# Altium PCB CE_BJTInfineonTSFP-4-1_Simple_v1.PcbDoc
Units mm, origin at the board's own origin, x right, y up, seen from the top; angles counter-clockwise.
Board outline 40 x 8 mm, 2 copper layers (Top Layer, Bottom Layer); 17 components, 8 nets, 41 pads, 4 vias.
Unrouted connection lines stored in the file: 1.
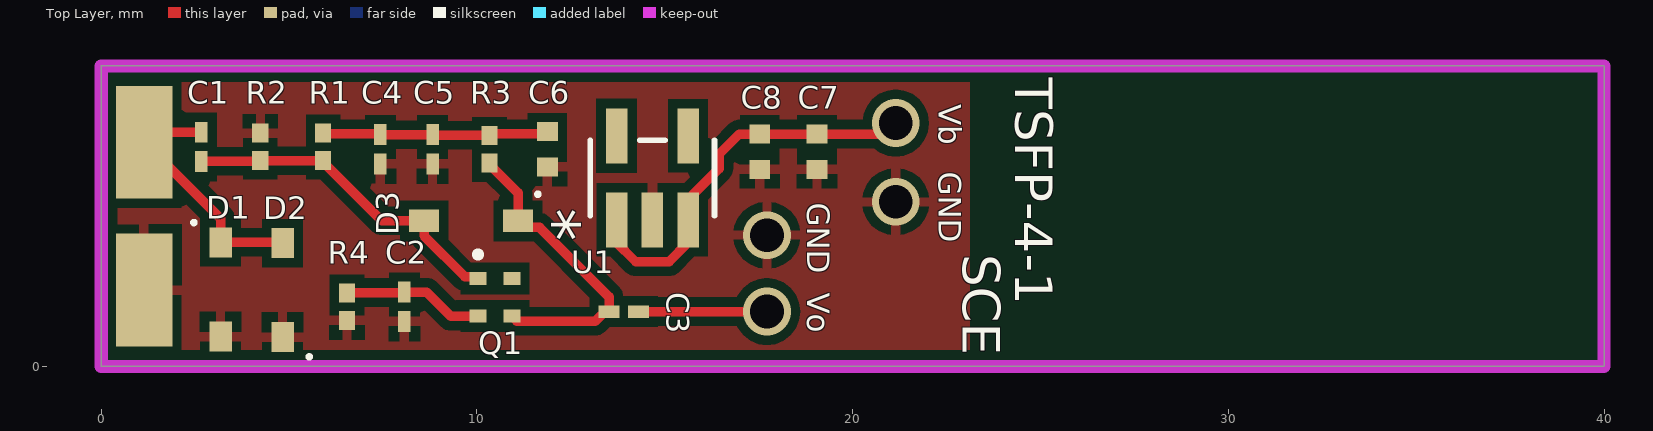
[diagram p0: Top Layer view]
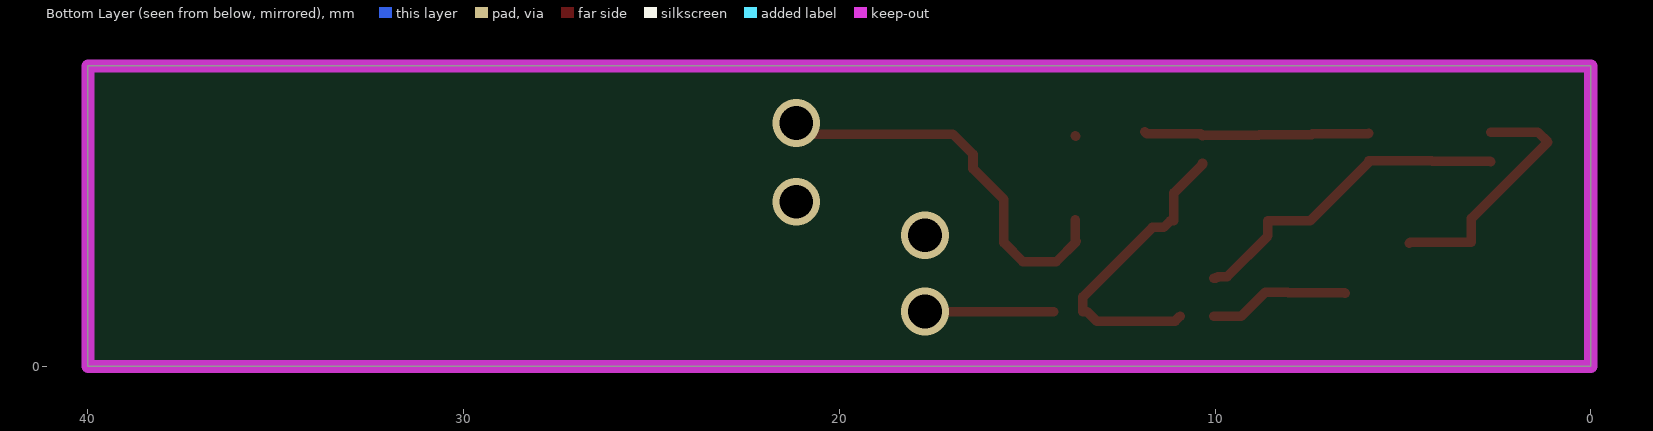
[diagram p1: Bottom Layer view, seen from below]

## Layer stack, top to bottom
Top Solder: solder mask 0.0102, Solder Resist, Dk 3.5
Top Layer: signal copper 0.0356
Dielectric 1: dielectric 0.32, FR-4, Dk 4.8
Bottom Layer: signal copper 0.0356
Bottom Solder: solder mask 0.0102, Solder Resist, Dk 3.5

## Board outline
0,0 0,8 40,8 40,0

## Design rules (kind name [scope] priority, off if disabled: settings)
Clearance [All] p1: gap=0.254 ignorepadtopadclearanceinfootprint=FALSE except(0: Arc-Hole Track-Hole SMDPad-Hole THPad-Hole Via-Hole Fill-Hole Poly-Hole Region-Hole Text-Hole)
PolygonConnect [All] p1: connectstyle=Relief reliefconductorwidth=0.254 reliefentries=4 polygonreliefangle="90 Angle" airgapwidth=0.254
RoomDefinition CE_BJTInfineonTSFP-4-1_Simple_v1 [InComponentClass('CE_BJTInfineonTSFP-4-1_Simple_v1')] p1: confinementstyle=ConfineIn formatcopy=TRUE lockcomponents=FALSE outline 0,0 40.005,0 40.005,7.937 0,7.937
RoutingVias [All] p1: holewidth=0.711 width=1.27 viastyle="Through Hole" minholewidth=0.711 minwidth=1.27 maxholewidth=0.711 maxwidth=1.27
SolderMaskExpansion [All] p1: expansion=0.102
Width [All] p1: maxlimit=0.254 minlimit=0.254 preferedwidth=0.254
30 further rules are at their usual default settings.

## Components (designator, comment, footprint, x,y, rotation, side; value= is the part's Value field where it differs from the comment)
C1 "Cin" C0201 2.667,5.841 r270 top value=Value
C2 "" C0201 8.064,1.587 r90 top value=Value
C3 "" C0201 13.906,1.46 r0 top value=Value
C4 "" CAP_CBR_0201 7.429,5.778 r90 top value=Value
C5 "" CAP_CBR_0201 8.818,5.778 r90 top value=Value
C6 "" YAG_CC0402 11.874,5.778 r90 top value=Value
C7 "" YAG_CC0402 19.05,5.714 r90 top value=Value
C8 "" YAG_CC0402 17.526,5.714 r90 top value=Value
D1 "" INF-SOD323_V 3.175,2.051 r0 top
D2 "" INF-SOD323_V 4.826,2.031 r180 top
D3 "" INF-SOD323_V 9.842,3.873 r270 top
Q1 "BFP720F" INF-TSFP-4-1_V 10.477,1.841 r0 top
R1 "" RES_RC0201_P6XP3 5.905,5.841 r90 top value=Value
R2 "" RES_RC0201_P6XP3 4.233,5.841 r270 top value=Value
R3 "" RES_RC0201_P6XP3 10.334,5.778 r90 top value=Value
R4 "" RES_RC0201_P6XP3 6.54,1.587 r90 top value=Value
U1 "" DBV5 14.668,5.016 r90 top value=Value

## Footprints (in the part's own frame and the unit in brackets; to place one, negate y for a bottom-side part, rotate by r counter-clockwise, add the part's x,y. Pads: shape width x height; smd on the part's side, far side on the other; paste and mask are expansions set on the pad)
C0201 [mil]
  rect 21.78x13 smd paste+0 mask+0: 1(-15.39,0) 2(15.39,0)
  body extent 0,0 10,10, height 10
CAP_CBR_0201 [mil]
  rect 21.78x13 smd paste+0 mask+0: 1(-15.39,0) 2(15.39,0)
  body extent 0,0 10,10, height 10
DBV5 [mil]
  rect 57.56x22.36 smd paste+0 mask+0: 1(-44,37.4) 2(-44,0) 3(-44,-37.4) 4(44,-37.4) 5(44,37.4)
  silkscreen extent -40,-65 40,65, body extent 0,0 10,10, height 10
INF-SOD323_V [mm] "SOD, 2-Leads, Body 1.7x1.25 mm"
  rect 0.6x0.8 smd: 1(0,1.25) 2(0,-1.25)
  silkscreen extent -0.76,1.73 -0.66,1.83, body extent -0.63,-0.85 0.63,0.85, height 1.1
INF-TSFP-4-1_V [mm] "SOP-Flat, Body 0.8x1.4 mm, Pitch 1 mm"
  rect 0.45x0.35 smd: 1(-0.45,0.5) 2(-0.45,-0.5) 3(0.45,-0.5) 4(0.45,0.5)
  silkscreen extent -0.49,1.1 -0.41,1.17, body extent -0.4,-0.7 0.4,0.7, height 0.59
RES_RC0201_P6XP3 [mm]
  rect 0.503x0.43 smd paste+0 mask+0: 1(-0.366,0) 2(0.366,0)
  body extent 0,0 0.25,0.25, height 0.25
YAG_CC0402 [mil]
  rect 20x22 smd paste+0 mask+0: 1(-18.5,0) 2(18.5,0)
  body extent 0,0 10,10, height 10

## Part data
C1 C2 C3: library part C0201C270J3GACTU, "No Description Available", Built_By=EMA_UL_Team, Copyright="Copyright (C) 2018 Accelerated Designs. All rights reserved", Manufacturer_Part_Number=C0201C270J3GACTU, RefDes=RefDes, Type=DEV, Vendor=Kemet
C4 C5: library part CBR02C399C3GAC, "No Description Available", Built_By=EMA_UL_Team, Copyright="Copyright (C) 2018 Accelerated Designs. All rights reserved", Manufacturer_Part_Number=CBR02C399C3GAC, RefDes=RefDes, Type=DEV, Vendor=KEMET
C6 C7 C8: library part CC0402KRX7R9BB10, "No Description Available", Manufacturer_Part_Number=CC0402KRX7R9BB103, Built_By=EMA_UL_Team, Copyright="Copyright (C) 2018 Accelerated Designs. All rights reserved", RefDes=RefDes, Type=DEV, Vendor=Yageo
D1 D2 D3: library part BAT15-03W, "Single Silicon Schottky Diode, 110 mA IF Max, SOD32, Green", Manufacturer=Infineon, Supplier Part Number 1=N/A, ComponentLink1Description="Manufacturer URL", ComponentLink1URL=http://www.infineon.com/, ComponentLink2Description=Datasheet, ComponentLink2URL=http://www.infineon.com/dgdl/bat15series.pdf?folderId=db3a304314dca3890114ff6812070b44&fileId=db3a304314dca3890114ff6b74ca0b48&location=en.Products.RF.RF_Mixer___Detector_Schottky_Diodes.DATASHEET.bat15series.pdf, ComponentLink3Description="Package Specification", ComponentLink3URL=http://www.infineon.com/dgdl/SOD323-Package_Overview.pdf?folderId=db3a30431936bc4b011952aab84f3bbe&fileId=db3a30431936bc4b011952beed653be3, Configuration=Single, CT (typ)="0.26 pF", DatasheetVersion=Jun-2011, Green=yes, Group="RF Mixer", IF (max)="110 mA", Mounting Technology="Surface Mount", PackageDescription="2-Pin Small Outline Diode Package, 1.25 x 1.7 mm Body", PackageReference=SOD323, PartNumber=BAT15-03W, Supplier 1=Mouser, VF (typ)="0.23 V", VR (max)="4 V"
Q1: "SiGe:C Heterojunction Wideband RF Bipolar Transistor, 4 V VCEO, 20 mA IC, 26 dB Gmax, TSFP-4-1, Green", Manufacturer=Infineon, ComponentLink1Description="Manufacturer URL", ComponentLink1URL=http://www.infineon.com/, ComponentLink2Description=Datasheet, ComponentLink2URL=http://www.infineon.com/dgdl/bfp720f.pdf?folderId=db3a30431400ef68011425b291f205c5&fileId=db3a30431ddc9372011e2673bdbf4727&location=en.Products.RF.RF_Transistors_.Ultra_Low_Noise_SiGe_C_Transistors_for_use_up_to_12_GHz.DATASHEET.bfp720f.pdf, ComponentLink3Description="Package Specification", ComponentLink3URL=http://www.infineon.com/dgdl/TSFP-4-1%2C-2-Package_Overview.pdf?folderId=db3a30431936bc4b011953b7d203683d&fileId=db3a30431936bc4b011953c249663734, DatasheetVersion="Rev. 1.0", Gmax (typ)="26 dB", Green=yes, Group="Ultra low noise SiGe", Halogen-free=yes, IC (max)="20 mA", Mounting Technology="Surface Mount", NFmin (typ)="0.5 dB", PackageDescription="4-Pin Thin Small Flat Package, 0.8 x 1.4 mm Body, 0.5 mm Pitch", PackageReference=TSFP-4-1, PartNumber=BFP720F, Ptot (max)=80mW, VCEO (max)="4 V"
R1 R2 R3 R4: library part RC0201FR-0718KL, "No Description Available", Built_By=EMA_Anthony, Copyright="Copyright (C) 2018 Accelerated Designs. All rights reserved", Manufacturer_Part_Number=RC0201FR-0718KL, RefDes=RefDes, Type=DEV, Vendor=Yageo
U1: library part LP5907MFX-3.3/NO, "No Description Available", Manufacturer_Part_Number=LP5907MFX-3.3/NOPB, Built_By=EMA_UL_Team, Copyright="Copyright (C) 2018 Accelerated Designs. All rights reserved", RefDes=RefDes, Type=DEV, Vendor="Texas Instruments"

## Free pads (board coordinates)
  rect 1.5x3 smd: ""(1.143,2.031) ""(1.143,5.968)

## Via types
v1: diameter 1.27, hole 0.9, Top Layer to Bottom Layer, 4 vias

## Nets (pads, with @x,y where several pads share a name; then routed paths per layer and width w, separated by ;. In a path a pad name is that pad's centre, name@x,y a point inside that pad or via, vN(x,y) a via of type N, cw(c..) or ccw(c..) an arc to the next point about the centre after c; other vN are vias at no path point)
B: C1.2 D3.2 Q1.1 R1.1 R2.2 | length 8.9
  Top Layer w0.254: C1.2 2.679,5.463 4.22,5.463 R2.2 R1.1 5.905,5.439 7.472,3.873 D3.2 8.592,3.472 9.676,2.389 9.93,2.389 9.978,2.341 Q1.1
C: C3.1 D3.1 Q1.3 R3.1 | length 8.3
  Top Layer w0.254: R3.1 10.334,5.376 11.093,4.617 D3.1 11.193,3.873 11.366,3.7 11.666,3.7 13.516,1.851 C3.1 13.404,1.46 13.15,1.206 11.063,1.206 Q1.3
E: C2.2 Q1.2 R4.2 | length 3.8
  Top Layer w0.254: R4.2 6.553,1.965 8.052,1.965 C2.2 8.66,1.978 9.296,1.341 Q1.2
GND: C2.1 C4.1 C5.1 C6.1 C7.1 C8.1 D1.2 D2.1 pad.@1.143,2.031 R2.1 R4.1 U1.2
  other v1: 17.716,3.492 21.145,4.381
Vbatt: C7.2 C8.2 U1.1 U1.3 | length 10.7
  Top Layer w0.254: U1.1 13.718,3.357 13.687,3.326 14.227,2.786 15.11,2.786 15.619,3.295 U1.3 15.619,4.442 16.441,5.265 16.441,5.646 16.98,6.184 C8.2 C7.2 20.853,6.184 v1(21.145,6.476)
Vcc: C4.2 C5.2 C6.2 R1.2 R3.2 U1.5 | length 6.1
  Top Layer w0.254: R1.2 5.925,6.188 7.41,6.188 C4.2 C5.2 8.831,6.156 10.321,6.156 R3.2 10.386,6.196 11.822,6.196 C6.2 ; U1.5@13.706,6.121 U1.5
Vin: C1.1 D1.1 D2.2 pad.@1.143,5.968 | length 6.8
  Top Layer w0.254: C1.1 1.407,6.232 1.143,5.968 3.175,3.936 D1.1 4.806,3.301 D2.2
Vout: C3.2 | length 3.4
  Top Layer w0.254: C3.2 v1(17.716,1.46)
pads on no net: Q1.4 U1.4

## Polygon pours and split planes (outlines as drawn)
GND on Top Layer "Top Layer-No Net 3" (solid, remove dead copper, pour order 0): 0,7.873 0.127,8.001 22.987,8 23.114,7.873 23.114,0.126 22.987,-0.001 0.127,-0.001 0,0.126

## Keep-outs
Keep-Out Layer:
  the board outline again, w0.35

## Silkscreen, mask and mechanical layers (free items; w line width, h text height)
Top Overlay:
  text "TSFP-4-1" at 24.32,7.683 h1 r270
  text "Vb" at 22.288,6.976 h0.6 r270
  text "GND" at 22.288,5.181 h0.6 r270
  text "GND" at 18.796,4.355 h0.6 r270
  text "SCE" at 22.924,2.984 h1 r270
  text "Vo" at 18.796,1.96 h0.6 r270

## Text inside footprints (layer, text, board x,y; h text height)
U1: Top Overlay "*" at 13.277,3.327 h1.27 r90; Mechanical 13 "*" at 14.243,4.076 h1.27 r90